# EAGLE board BMSafeMasterV2 (EAGLE 6.3), part 1 of 2
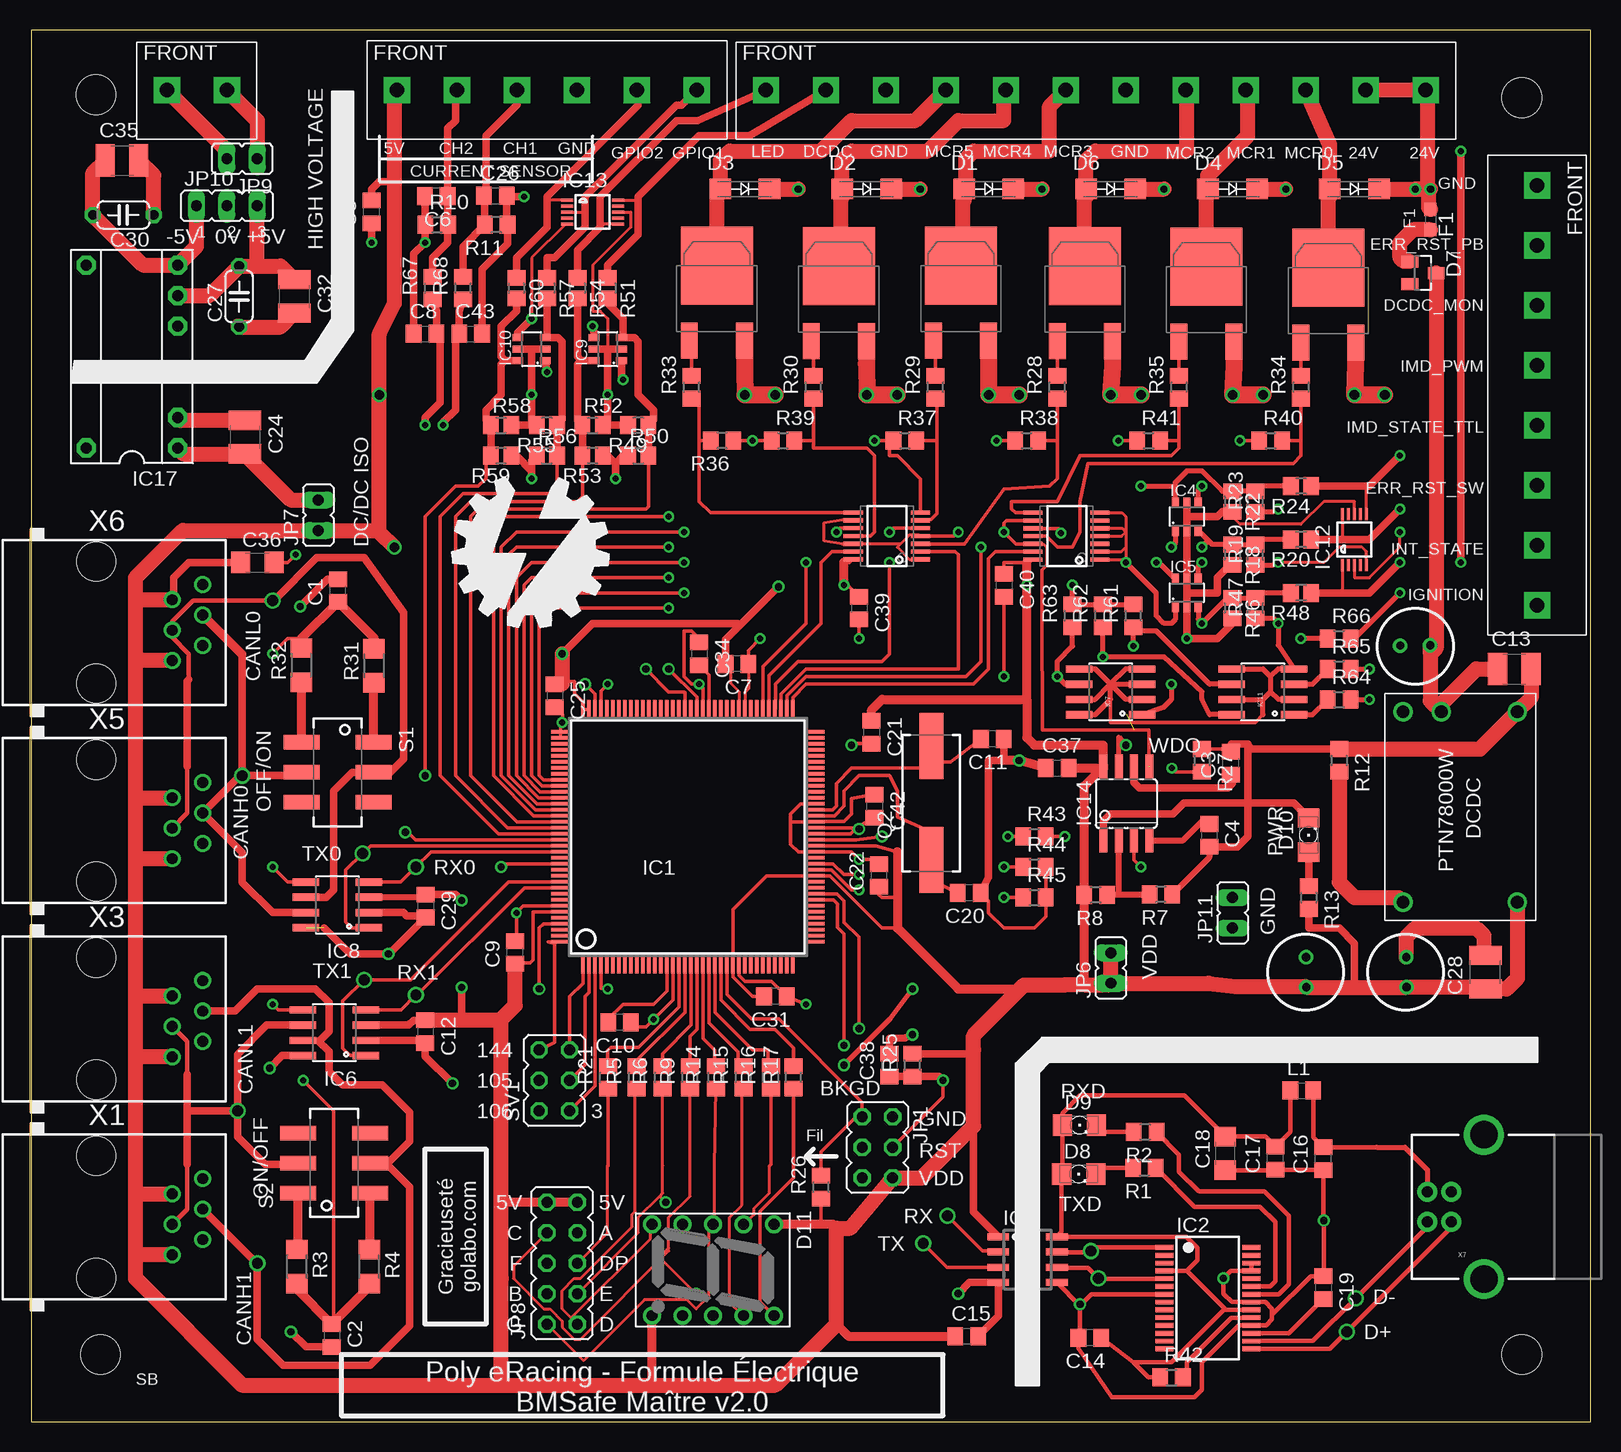
[diagram p0: board, top side]
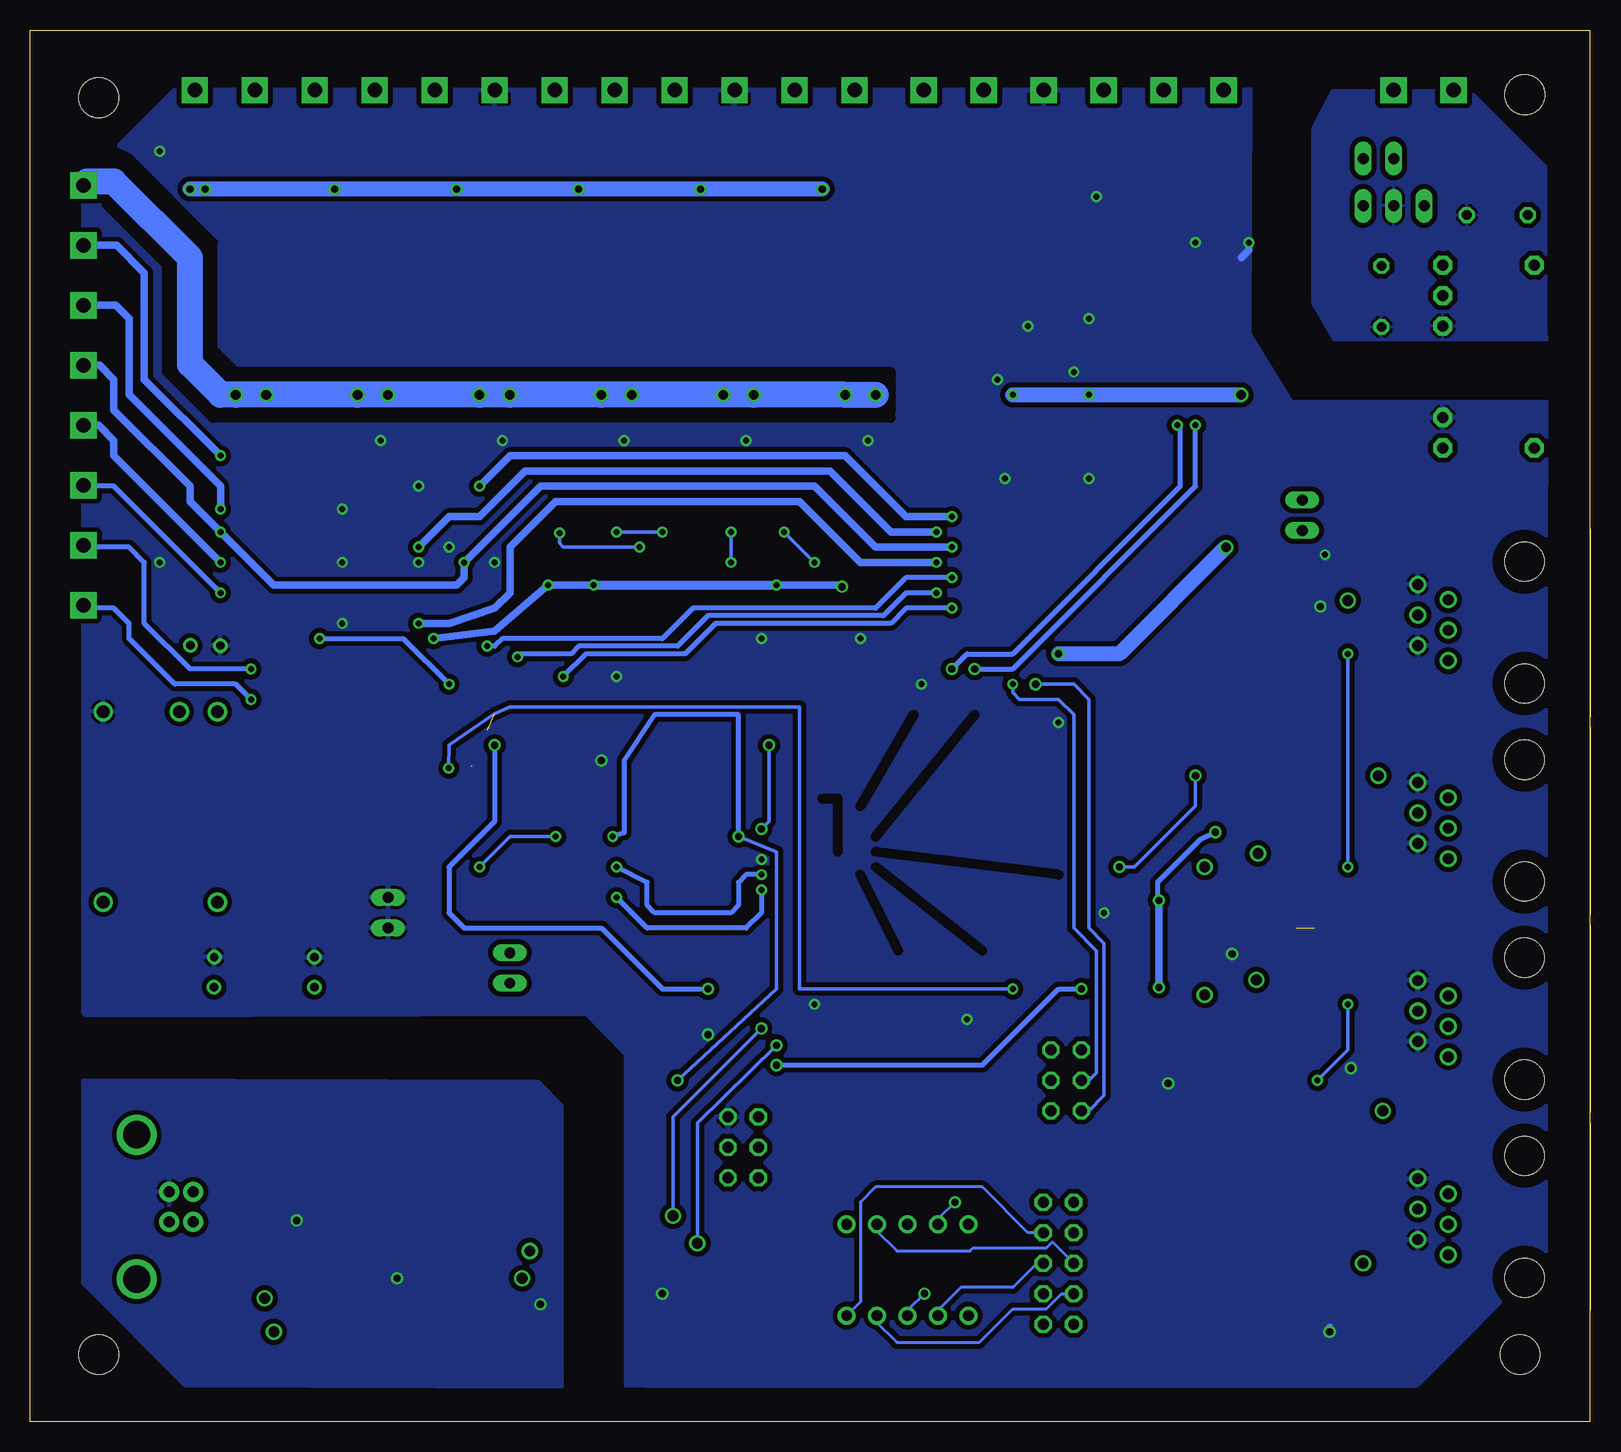
[diagram p1: board, bottom side, seen from below]

Size 130.09 x 116 mm. Coordinates in mm from the lower left corner, seen from the top.
Copper layers (1*16): Top 0.035mm / dielectric 1.5mm / Bottom 0.035mm
Design rules "labo_circuits": minimum track width 5mil, minimum drill 0.200659375mm, track to track 5mil, track to pad 5mil, pad to pad 5mil, via to via 5mil, smd to smd 5mil, copper to edge 40mil, drill to drill 8mil, minimum pad ring 10mil, minimum via ring 8mil, stop-mask expansion 4mil, vias tented up to drill 0mil, thermal gap 10mil
bRestrict: 17 lines

## Footprints (pad centres in the part's own frame; a part is rotated, then mirrored left to right if it is on the bottom)
C0805 = smd 1.3 x 1.5: 1 -0.95,0; 2 0.95,0
C1210 = smd 1.6 x 2.7: 1 -1.4,0; 2 1.4,0
C1206 = smd 1.6 x 1.8: 1 -1.4,0; 2 1.4,0
EEU-FM1E101 = drill 0.7: 1 -1.25,-0.06; 2 1.25,-0.05
C050-024X044 = drill 0.813 octagon: 1 -2.54,0; 2 2.54,0
SMA-DO214AC = smd 1.8 x 1.7: A -2.05,0; K 2.05,0
SOT23 = smd 1 x 1.4: 1 -0.95,-1.1; 2 0.95,-1.1; 3 0,1.1
1206 = smd 1.6 x 1.803: A -1.422,0; C 1.422,0
LA-401 = drill 0.9 pad 1.5: 1 -3.81,5.08; 2 -3.81,2.54; 3 -3.81,0; 4 -3.81,-2.54; 5 -3.81,-5.08; 6 3.81,-5.08; 7 3.81,-2.54; 8 3.81,0; 9 3.81,2.54; 10 3.81,5.08
0603 = smd 1.1 x 1: 1 -0.85,0; 2 0.85,0
SQFP-S-20X20-144 = smd 0.3 x 1.6: 1 -8.75,-10.6; 2 -8.25,-10.6; 3 -7.75,-10.6; 4 -7.25,-10.6; 5 -6.75,-10.6; 6 -6.25,-10.6; 7 -5.75,-10.6; 8 -5.25,-10.6; 9 -4.75,-10.6; 10 -4.25,-10.6; 11 -3.75,-10.6; 12 -3.25,-10.6; 13 -2.75,-10.6; 14 -2.25,-10.6; 15 -1.75,-10.6; 16 -1.25,-10.6; 17 -0.75,-10.6; 18 -0.25,-10.6; 19 0.25,-10.6; 20 0.75,-10.6; 21 1.25,-10.6; 22 1.75,-10.6; 23 2.25,-10.6; 24 2.75,-10.6; 25 3.25,-10.6; 26 3.75,-10.6; 27 4.25,-10.6; 28 4.75,-10.6; 29 5.25,-10.6; 30 5.75,-10.6; 31 6.25,-10.6; 32 6.75,-10.6; 33 7.25,-10.6; 34 7.75,-10.6; 35 8.25,-10.6; 36 8.75,-10.6; 73 8.75,10.6; 74 8.25,10.6; 75 7.75,10.6; 76 7.25,10.6; 77 6.75,10.6; 78 6.25,10.6; 79 5.75,10.6; 80 5.25,10.6; 81 4.75,10.6; 82 4.25,10.6; 83 3.75,10.6; 84 3.25,10.6; 85 2.75,10.6; 86 2.25,10.6; 87 1.75,10.6; 88 1.25,10.6; 89 0.75,10.6; 90 0.25,10.6; 91 -0.25,10.6; 92 -0.75,10.6; 93 -1.25,10.6; 94 -1.75,10.6; 95 -2.25,10.6; 96 -2.75,10.6; 97 -3.25,10.6; 98 -3.75,10.6; 99 -4.25,10.6; 100 -4.75,10.6; 101 -5.25,10.6; 102 -5.75,10.6; 103 -6.25,10.6; 104 -6.75,10.6; 105 -7.25,10.6; 106 -7.75,10.6; 107 -8.25,10.6; 108 -8.75,10.6 | smd 1.6 x 0.3: 37 10.6,-8.75; 38 10.6,-8.25; 39 10.6,-7.75; 40 10.6,-7.25; 41 10.6,-6.75; 42 10.6,-6.25; 43 10.6,-5.75; 44 10.6,-5.25; 45 10.6,-4.75; 46 10.6,-4.25; 47 10.6,-3.75; 48 10.6,-3.25; 49 10.6,-2.75; 50 10.6,-2.25; 51 10.6,-1.75; 52 10.6,-1.25; 53 10.6,-0.75; 54 10.6,-0.25; 55 10.6,0.25; 56 10.6,0.75; 57 10.6,1.25; 58 10.6,1.75; 59 10.6,2.25; 60 10.6,2.75; 61 10.6,3.25; 62 10.6,3.75; 63 10.6,4.25; 64 10.6,4.75; 65 10.6,5.25; 66 10.6,5.75; 67 10.6,6.25; 68 10.6,6.75; 69 10.6,7.25; 70 10.6,7.75; 71 10.6,8.25; 72 10.6,8.75; 109 -10.6,8.75; 110 -10.6,8.25; 111 -10.6,7.75; 112 -10.6,7.25; 113 -10.6,6.75; 114 -10.6,6.25; 115 -10.6,5.75; 116 -10.6,5.25; 117 -10.6,4.75; 118 -10.6,4.25; 119 -10.6,3.75; 120 -10.6,3.25; 121 -10.6,2.75; 122 -10.6,2.25; 123 -10.6,1.75; 124 -10.6,1.25; 125 -10.6,0.75; 126 -10.6,0.25; 127 -10.6,-0.25; 128 -10.6,-0.75; 129 -10.6,-1.25; 130 -10.6,-1.75; 131 -10.6,-2.25; 132 -10.6,-2.75; 133 -10.6,-3.25; 134 -10.6,-3.75; 135 -10.6,-4.25; 136 -10.6,-4.75; 137 -10.6,-5.25; 138 -10.6,-5.75; 139 -10.6,-6.25; 140 -10.6,-6.75; 141 -10.6,-7.25; 142 -10.6,-7.75; 143 -10.6,-8.25; 144 -10.6,-8.75
SSOP28 = smd 0.4 x 1.5: 1 -4.225,-3.625; 2 -3.575,-3.625; 3 -2.925,-3.625; 4 -2.275,-3.625; 5 -1.625,-3.625; 6 -0.975,-3.625; 7 -0.325,-3.625; 8 0.325,-3.625; 9 0.975,-3.625; 10 1.625,-3.625; 11 2.275,-3.625; 12 2.925,-3.625; 13 3.575,-3.625; 14 4.225,-3.625; 15 4.225,3.625; 16 3.575,3.625; 17 2.925,3.625; 18 2.275,3.625; 19 1.625,3.625; 20 0.975,3.625; 21 0.325,3.625; 22 -0.325,3.625; 23 -0.975,3.625; 24 -1.625,3.625; 25 -2.275,3.625; 26 -2.925,3.625; 27 -3.575,3.625; 28 -4.225,3.625
SOIC = smd 0.6 x 1.8: 1 -1.905,-2.44; 2 -0.635,-2.44; 3 0.635,-2.44; 4 1.905,-2.44; 5 1.905,2.44; 6 0.635,2.44; 7 -0.635,2.44; 8 -1.905,2.44
SOT-26 = smd 0.6 x 0.9: 1 -0.95,-1.15; 2 0,-1.15; 3 0.95,-1.15; 4 0.95,1.15; 5 0,1.15; 6 -0.95,1.15
SO8 = smd 0.61 x 2.21: 1 -1.905,-2.616; 2 -0.635,-2.616; 3 0.635,-2.616; 4 1.905,-2.616; 5 1.905,2.616; 6 0.635,2.616; 7 -0.635,2.616; 8 -1.905,2.616
SO08 = smd 0.61 x 2.21: 1 -1.905,-2.616; 2 -0.635,-2.616; 3 0.635,-2.616; 4 1.905,-2.616; 5 1.905,2.616; 6 0.635,2.616; 7 -0.635,2.616; 8 -1.905,2.616
MSOP10 = smd 1 x 0.25: 1 -2.113,1; 2 -2.113,0.5; 3 -2.113,0; 4 -2.113,-0.5; 5 -2.113,-1; 6 2.113,-1; 7 2.113,-0.5; 8 2.113,0; 9 2.113,0.5; 10 2.113,1
SOIC08 = smd 0.66 x 2.032: 1 -1.905,-3.073; 2 -0.635,-3.073; 3 0.635,-3.073; 4 1.905,-3.073; 5 1.905,3.073; 6 0.635,3.073; 7 -0.635,3.073; 8 -1.905,3.073
TSSOP14 = smd 0.35 x 1.6: 1 -1.95,-2.8; 2 -1.3,-2.8; 3 -0.65,-2.8; 4 0,-2.8; 5 0.65,-2.8; 6 1.3,-2.8; 7 1.95,-2.8; 8 1.95,2.8; 9 1.3,2.8; 10 0.65,2.8; 11 0,2.8; 12 -0.65,2.8; 13 -1.3,2.8; 14 -1.95,2.8
DIL14/7 = drill 0.914 pad 1.6 octagon: 1 -7.62,-3.81; 2 -5.08,-3.81; 5 2.54,-3.81; 6 5.08,-3.81; 7 7.62,-3.81; 8 7.62,3.81; 14 -7.62,3.81
DCDCMAITRE_HOLES = drill 1.067: 1 -7.874,4.699; 2 -7.874,-1.651; 3 -7.874,-4.826; 4 8.001,-4.826; 5 8.001,4.699
JP3Q = drill 0.914 octagon: 1 -2.54,-1.27; 2 -2.54,1.27; 3 0,-1.27; 4 0,1.27; 5 2.54,-1.27; 6 2.54,1.27
STAND-OFF = hole 3.302: 0,0
JP1 = drill 0.914 long: 1 0,-1.27; 2 0,1.27
JP5Q = drill 0.914 octagon: 1 -5.08,-1.27; 2 -5.08,1.27; 3 -2.54,-1.27; 4 -2.54,1.27; 5 0,-1.27; 6 0,1.27; 7 2.54,-1.27; 8 2.54,1.27; 9 5.08,-1.27; 10 5.08,1.27
JP2 = drill 0.914 long: 1 -2.54,0; 2 0,0; 3 2.54,0
TO-252 = smd 1.4 x 3: P$1 -2.3,-6.25; P$3 2.3,-6.25 | smd 6 x 6.5: P$4 0,0
CSM-7X = smd 5.5 x 2: 1 -4.75,0; 2 4.75,0
R0805 = smd 1.3 x 1.5: 1 -0.95,0; 2 0.95,0
R1206 = smd 1.6 x 1.803: 1 -1.422,0; 2 1.422,0
R0805' = smd 1.3 x 1.5: 1 -0.85,0; 2 0.85,0
DPDT = smd 1.2 x 3: 1 -2.5,3; 2 0,3; 3 2.5,3; 4 -2.5,-3; 5 0,-3; 6 2.5,-3
RJ11-NO_SHIELD = drill 0.9 pad 1.4: 1 -3.175,8.89; 2 -1.905,6.35; 3 -0.635,8.89; 4 0.635,6.35; 5 1.905,8.89; 6 3.175,6.35 | hole 3.251: -5.08,0; 5.08,0
282836-6 = drill 1.2 pad 2.184 square: CON01 -12.5,0; CON02 -7.5,0; CON03 -2.5,0; CON04 2.5,0; CON05 7.5,0; CON06 12.5,0
1-282836-2 = drill 1.2 pad 2.184 square: CON1 -30,0; CON2 -25,0; CON3 -20,0; CON4 -15,0; CON5 -10,0; CON6 -5,0; CON7 0,0; CON8 5,0; CON9 10,0; CON10 15,0; CON11 20,0; CON12 25,0
USB-B-PTH = drill 0.914 pad 1.676: D+ 0,1.25; D- 1.981,1.25; GND 0,-1.25; VBUS 1.981,-1.25 | drill 2.286: S1 -2.718,-6.02; S2 -2.718,6.02
282836-2 = drill 1.2 pad 2.184 square: CON1 -2.46,0; CON2 2.54,0
282836-8 = drill 1.2 pad 2.184 square: CON01 -20,0; CON02 -15,0; CON03 -10,0; CON04 -5,0; CON05 0,0; CON06 5,0; CON07 10,0; CON08 15,0

## Placement (x,y rotation side)
C1  47n  [C0805]  25.67,69.27 90 top
C2  47n  [C0805]  25.16,7.17 270 top
C3  100n  [C0805]  100.11,54.87 90 top
C4  100n  [C0805]  98.3,48.87 270 top
C5  47n  [C0805]  28.48,100.83 90 top
C6  47n  [C0805]  33.86,102.15 180 top
C7  100n  [C0805]  58.93,63.16 180 top
C8  LPF  [C0805]  32.93,90.67 0 top
C9  100n  [C0805]  40.44,39.1 90 top
C10  220nF  [C0805]  49.15,33.27 180 top
C11  18p  [C0805]  80.22,56.9 180 top
C12  100n  [C0805]  32.95,32.51 270 top
C13  2.2u  [C1210]  123.73,62.73 0 top
C14  0.047u  [C0805]  88.35,6.97 180 top
C15  0.047u  [C0805]  78.08,7.12 0 top
C16  10n  [C0805]  107.8,21.91 90 top
C17  100n  [C0805]  103.81,21.96 90 top
C18  4.7u  [C1206]  99.64,22.35 90 top
C19  100n  [C0805]  107.82,11.18 270 top
C20  18p  [C0805]  78.3,44.07 180 top
C21  100n  [C0805]  70.16,57.46 270 top
C22  100n  [C0805]  70.79,45.52 90 top
C23  100u  [EEU-FM1E101]  106.33,37.46 90 top
C24  2.2u  [C1210]  17.92,82.06 270 top
C25  100n  [C0805]  43.75,60.5 270 top
C26  47n  [C0805]  38.8,102.18 0 top
C27  1u  [C050-024X044]  17.43,93.79 90 top
C28  2.2u  [C1210]  121.32,37.46 90 top
C29  100n  [C0805]  32.98,42.97 270 top
C30  1u  [C050-024X044]  7.78,100.58 180 top
C31  100n  [C0805]  62.14,35.43 180 top
C32  2.2u  [C1210]  22.03,93.78 270 top
C33  100u  [EEU-FM1E101]  114.68,37.47 90 top
C34  220nF  [C0805]  55.79,64 270 top
C35  2.2u  [C1210]  7.67,105.12 0 top
C36  4.7u  [C1206]  18.96,71.62 0 top
C37  100n  [C0805]  85.63,54.47 0 top
C38  100p  [C0805]  71.66,29.71 90 top
C39  100n  [C0805]  69.12,67.81 270 top
C40  100n  [C0805]  81.19,69.71 270 top
C41  470u  [EEU-FM1E101]  115.48,64.63 180 top
C42  220n  [C0805]  70.39,51.3 270 top
C43  LPF  [C0805]  36.74,90.67 0 top
D1  GF1  [SMA-DO214AC]  79.92,102.74 0 top
D2  GF1  [SMA-DO214AC]  69.76,102.74 0 top
D3  GF1  [SMA-DO214AC]  59.6,102.74 0 top
D4  GF1  [SMA-DO214AC]  100.24,102.74 0 top
D5  GF1  [SMA-DO214AC]  110.4,102.74 0 top
D6  GF1  [SMA-DO214AC]  90.08,102.74 0 top
D7  BAT54  [SOT23]  116.11,95.75 270 top
D8  [1206]  87.42,20.64 0 top
D9  [1206]  87.48,24.72 0 top
D10  [1206]  106.59,48.89 90 top
D11  LA-401AD  [LA-401]  56.93,12.64 270 top
F1  467  [0603]  116.75,100.19 270 top
IC1  MC9S12XF-144  [SQFP-S-20X20-144]  54.84,48.74 0 top
IC2  FT232RL  [SSOP28]  98.18,10.29 270 top
IC3  ADUM1201  [SOIC]  83.16,13.5 270 top
IC4  SDM10M45SD  [SOT-26]  96.43,75.43 0 top
IC5  SDM10M45SD  [SOT-26]  96.43,69.08 0 top
IC6  TJA1040  [SO8]  25.37,32.41 90 top
IC7  ILD213T  [SO08]  90.08,60.82 90 top
IC8  TJA1040  [SO8]  25.63,43.06 90 top
IC9  SDM10M45SD  [SOT-26]  48.17,89.4 90 top
IC10  SDM10M45SD  [SOT-26]  41.82,89.4 90 top
IC11  ILD213T  [SO08]  102.78,60.82 90 top
IC12  CM1213-08MR  [MSOP10]  110.4,73.52 90 top
IC13  CM1213-08MR  [MSOP10]  46.9,100.83 0 top
IC14  WATCHDOG  [SOIC08]  91.39,51.52 0 top
IC15  SN74HC08  [TSSOP14]  71.43,73.82 90 top
IC16  SN74HC08  [TSSOP14]  86.4,73.81 90 top
IC17  DCP0115P  [DIL14/7]  8.49,88.78 90 top
IC18  DCDCMAITRE_HOLES  [DCDCMAITRE_HOLES]  119.29,51.3 270 top
JP1  [JP3Q]  70.64,22.85 270 top
JP2  STAND-OFF  [STAND-OFF]  5.87,5.58 0 top
JP3  STAND-OFF  [STAND-OFF]  124.37,5.58 0 top
JP4  STAND-OFF  [STAND-OFF]  5.49,110.61 0 top
JP5  STAND-OFF  [STAND-OFF]  124.37,110.36 0 top
JP6  [JP1]  90.09,37.81 0 top
JP7  [JP1]  24.04,75.56 0 top
JP8  [JP5Q]  44.36,13.2 90 top
JP9  [JP1]  17.69,105.27 90 top
JP10  [JP2]  16.42,101.34 0 top
JP11  [JP1]  100.24,42.41 0 top
L1  MYDEVICE  [C0805]  106.01,27.59 0 top
Q1  IRLR014  [TO-252]  57.27,96.35 0 top
Q2  [CSM-7X]  75.14,51.55 90 top
Q3  IRLR014  [TO-252]  67.43,96.32 0 top
Q4  IRLR014  [TO-252]  77.6,96.35 0 top
Q5  IRLR014  [TO-252]  87.94,96.32 0 top
Q6  IRLR014  [TO-252]  108.23,96.19 0 top
Q7  IRLR014  [TO-252]  98.07,96.26 0 top
R1  475  [R0805]  92.9,21.13 180 top
R2  475  [R0805]  92.95,24.13 180 top
R3  60.4  [R1206]  22.25,12.93 270 top
R4  60.4  [R1206]  28.29,12.91 270 top
R5  10K  [R0805]  50.58,28.69 90 top
R6  10K  [R0805]  52.74,28.69 90 top
R7  1M  [R0805]  94.27,43.93 180 top
R8  1M  [R0805]  88.84,43.9 180 top
R9  10K  [R0805]  55.03,28.69 90 top
R10  100k  [R0805]  33.91,99.77 0 top
R11  100k  [R0805]  38.86,99.77 180 top
R12  21k  [R0805]  109.13,55.11 270 top
R13  475  [R0805]  106.59,43.68 270 top
R14  10K  [R0805]  57.18,28.69 90 top
R15  10K  [R0805]  59.47,28.69 90 top
R16  10K  [R0805]  61.76,28.69 90 top
R17  10K  [R0805]  63.65,28.69 90 top
R18  10k  [R0805']  100.24,72.25 270 top
R19  10k  [R0805']  102.14,72.25 90 top
R20  2.5k  [R0805']  105.95,73.52 180 top
R21  10k  [R0805]  48.17,28.69 90 top
R22  10k  [R0805']  100.24,76.7 270 top
R23  10k  [R0805']  102.14,76.7 90 top
R24  2.5k  [R0805']  105.95,77.97 180 top
R25  10k  [R0805]  73.57,29.71 90 top
R26  10k  [R0805]  65.95,19.55 90 top
R27  10k  [R0805]  97.7,55.11 270 top
R28  1k  [R0805]  85.63,86.23 90 top
R29  1k  [R0805]  75.47,86.23 90 top
R30  1k  [R0805]  65.31,86.23 90 top
R31  60.4  [R1206]  28.67,63 90 top
R32  60.4  [R1206]  22.62,63.05 90 top
R33  1k  [R0805]  55.15,86.23 90 top
R34  1k  [R0805]  105.95,86.23 90 top
R35  1k  [R0805]  95.79,86.23 90 top
R36  10k  [R0805]  57.69,81.78 180 top
R37  10k  [R0805]  72.93,81.78 0 top
R38  10k  [R0805]  83.09,81.78 0 top
R39  10k  [R0805]  62.77,81.78 0 top
R40  10k  [R0805]  103.41,81.78 0 top
R41  10k  [R0805]  93.25,81.78 0 top
R42  10k  [R0805]  95.16,3.68 0 top
R43  0  [R0805]  83.73,48.76 0 top
R44  4.7k  [R0805]  83.73,46.22 0 top
R45  4.7k  [R0805]  83.73,43.68 0 top
R46  10k  [R0805']  100.24,67.81 270 top
R47  10k  [R0805']  102.14,67.81 90 top
R48  2.5k  [R0805']  105.95,69.08 180 top
R49  10k  [R0805']  50.71,83.05 180 top
R50  10k  [R0805']  50.71,80.51 0 top
R51  2.5k  [R0805']  48.17,94.48 270 top
R52  10k  [R0805']  46.9,83.05 0 top
R53  10k  [R0805']  46.9,80.51 180 top
R54  2.5k  [R0805']  45.63,94.48 270 top
R55  10k  [R0805']  43.09,83.05 180 top
R56  10k  [R0805']  43.09,80.51 0 top
R57  2.5k  [R0805']  43.09,94.48 270 top
R58  10k  [R0805']  39.28,83.05 0 top
R59  10k  [R0805']  39.28,80.51 180 top
R60  2.5k  [R0805']  40.55,94.48 270 top
R61  TBD  [R0805]  91.98,67.18 90 top
R62  TBD  [R0805]  89.44,67.18 90 top
R63  TBD  [R0805]  86.9,67.18 90 top
R64  TBD  [R0805]  109.13,60.19 0 top
R65  TBD  [R0805]  109.13,62.73 0 top
R66  TBD  [R0805]  109.13,65.27 0 top
R67  LPF  [R0805]  33.56,94.48 90 top
R68  LPF  [R0805]  36.1,94.48 90 top
S1  SWITCH_DPDT  [DPDT]  25.63,54.11 270 top
S2  SWITCH_DPDT  [DPDT]  25.37,21.55 90 top
SV1  [JP3Q]  43.72,28.44 90 top
X1  RJ11-2L-B  [RJ11-NO_SHIELD]  5.51,17.07 270 top
X2  282836-6  [282836-6]  43.09,110.99 0 top
X3  RJ11-2L-B  [RJ11-NO_SHIELD]  5.51,33.58 270 top
X4  1-282836-2  [1-282836-2]  91.35,110.99 0 top
X5  RJ11-2L-B  [RJ11-NO_SHIELD]  5.51,50.09 270 top
X6  RJ11-2L-B  [RJ11-NO_SHIELD]  5.51,66.6 270 top
X7  USBPTH  [USB-B-PTH]  118.47,17.88 180 top
X8  282836-2  [282836-2]  13.88,110.99 0 top
X9  282836-8  [282836-8]  125.64,83.05 270 top

## Library data of the parts
C1 C2 C5 C6 C14 C15 C26 = rcl; PARTNO: 08055C473KAT2A
C3 C4 C7 C9 C12 C17 C19 C21 C22 C25 C29 C31 C37 C39 C40 = rcl; PARTNO: 08055C104KAT2A
C8 C43 R61-R68 = rcl
C10 C34 C42 = rcl; PARTNO: C2012X7R1H224K125AA
C11 C20 = rcl; PARTNO: 08055A180JAT2A
C13 C28 = rcl; PARTNO: C3225X7R1H225K250AB
C16 = rcl; PARTNO: 08055C103KAT2A
C18 C36 = rcl; PARTNO: C3216X5R1A475K
C23 C33 = elc_n; PARTNO: EEU-FM1E101
C24 C32 C35 = rcl; DNP: T; PARTNO: C3225X7R1H225K250AB
C27 C30 = rcl; DNP: T; PARTNO: TAP105M035SCS
C38 = rcl; PARTNO: C0805C101J5GACTU
C41 = elc_n
D1-D6 = diode
D7 = diode; PARTNO: BAT750TA
D8 D9 = led; PARTNO: LTST-C150KSKT
D10 = led; PARTNO: LTST-C150KGKT
D11 = led-7-segment; PARTNO: LA-401AD
F1 = BMSafeMasterIO; PARTNO: 0467.250NR
IC1 = freescale; MPN: LFDAS12XFLT; OC_FARNELL: unknown; OC_NEWARK: 14M5920; PARTNO: MC9S12XDP512MAG
IC2 = ftdichip; PARTNO: FT232RL
IC3 = adum1201; PARTNO: ADUM1201WTRZ
IC4 IC5 IC9 IC10 = BMSafeMasterIO; PARTNO: SDM10M45SD-7-F
IC6 IC8 = ELE4000_BMS; PARTNO: TJA1040
IC7 IC11 = SparkFun; PARTNO: ILD213T
IC12 IC13 = BMSafeMasterIO; PARTNO: CM1213-08MR
IC14 = Watchdog; PARTNO: UCC2946D
IC15 IC16 = sn74hc08; PARTNO: SN74HC08QPWRQ1
IC17 = DCP0105; DNP: T; PARTNO: DCP010505BP-U
IC18 = PTN78000W; PARTNO: PTN78000WAH
JP1 = jumper; PARTNO: 67996-206HLF
JP2-JP5 = SparkFun; BOM: EXCLUDE
JP6 JP7 JP9 JP11 = jumper; DNP: T; PARTNO: 68001-202HLF
JP8 = jumper; DNP: T; PARTNO: 68602-110HLF
JP10 = jumper; DNP: T; PARTNO: 68000-103HLF
L1 = rcl; PARTNO: MI0805K400R-10
Q1 Q3-Q7 = transistor-power; PARTNO: IRLR014TRPBF
Q2 = ELE4000_BMS; PARTNO: ECS-160-18-5PXEN-TR
R1 R2 R13 = rcl; PARTNO: MCR10EZHF4750
R3 R4 R31 R32 = rcl; PARTNO: MCR18EZPF60R4
R5 R6 R9 R14-R17 R21 R25-R27 R36-R42 = rcl; PARTNO: RC0805JR-0710KL
R7 R8 = rcl; PARTNO: MCR10EZPJ105
R10 R11 = rcl; PARTNO: MCR10EZHJ104
R12 = rcl; PARTNO: RR1220P-2102-D-M
R18 R22 R46 R49 R52 R55 R58 = resistor; PARTNO: RC0805JR-0710KL
R19 R23 R47 R50 R53 R56 R59 = resistor; DNP: T; PARTNO: RC0805JR-0710KL
R20 R24 R48 R51 R54 R57 R60 = resistor; PARTNO: RC0805FR-072K43L
R28-R30 R33-R35 = rcl; PARTNO: RC0805JR-071KL
R43 = rcl; DNP: T; PARTNO: RMCF0805ZT0R00
R44 R45 = rcl; PARTNO: RMCF0805JT4K70
S1 S2 = ELE4000_BMS; PARTNO: JS202011SCQN
SV1 = jumper; DNP: T; PARTNO: 67996-206HLF
X1 X3 X5 X6 = con-tycoelectronics; PARTNO: 5555165-1
X2 = con_tyco_eurostyle; PARTNO: 282836-6
X4 = con_tyco_eurostyle; PARTNO: 1-282836-2
X7 = SparkFun; PARTNO: 292304-1
X8 = con_tyco_eurostyle; DNP: T; PARTNO: 282836-2
X9 = con_tyco_eurostyle; PARTNO: 282836-8

## Nets
5V_MST: C5.2 C7.2 C9.1 C12.1 C15.1 C21.1 C22.1 C23.1 C25.1 C28.1 C29.1 C31.2 C33.1 C36.1 C37.2 C39.1 C40.1 D11.1 D11.6 IC1.26 IC1.48 IC1.53 IC1.82 IC1.107 IC1.108 IC1.127 IC1.139 IC3.1 IC4.2 IC4.5 IC5.2 IC5.5 IC6.3 IC8.3 IC9.2 IC9.5 IC10.2 IC10.5 IC12.8 IC13.8 IC14.8 IC15.14 IC16.14 IC18.5 JP1.6 JP6.1 JP6.2 JP7.1 JP8.9 JP8.10 R8.2 R13.2 R18.2 R22.2 R25.2 R26.1 R46.2 R49.2 R52.2 R55.2 R58.2 R61.2 R62.2 R63.2 X1.2 X1.6 X2.CON01 X3.2 X3.6 X5.2 X5.6 X6.2 X6.6
5V_USB: C14.1 C17.2 C18.2 D8.A D9.A IC2.4 IC2.20 IC3.8 L1.1 R42.1
+5V_ISO: C27.2 C32.1 IC17.6 JP10.3
-5V_ISO: C30.2 C35.1 IC17.7 JP10.1
AN00: C43.1 IC1.89 R68.1
AN00_C: C26.1 R11.2 R68.2 X2.CON03
AN01: C8.2 IC1.91 R67.1
AN01_C: C6.1 R10.2 R67.2 X2.CON02
AN16: IC1.105 SV1.4
AN17: IC1.106 SV1.2
B: D11.9 JP8.4 R15.1
BKGD: IC1.25 JP1.1 R26.2
C: D11.8 JP8.8 R9.1
CANH0: IC8.7 S1.5 X5.3 X6.3
CANH1: IC6.7 S2.5 X1.3 X3.3
CANL0: IC8.6 S1.2 X5.4 X6.4
CANL1: IC6.6 S2.2 X1.4 X3.4
D: D11.5 JP8.1 R5.1
DCDC_MONITOR: IC1.122 IC4.3 R18.1 R19.2 R20.2
DCDC_MONITOR_C: IC12.10 R20.1 X9.CON03
DCDC_MOSFET: IC1.124 IC9.3 R49.1 R50.2 R51.2
DCDC_MOSFET_C: IC13.10 R51.1 X4.CON2
DP: D11.7 JP8.5 R21.1
E: D11.4 JP8.3 R6.1
ERR_RST_DASH: IC1.117 IC7.6 R63.1
ERR_RST_DASH_C: R66.2 X9.CON06
ERR_RST_PUSHBUTTON: IC1.123 IC4.6 R22.1 R23.2 R24.2
ERR_RST_PUSHBUTTON_C: IC12.6 R24.1 X9.CON02
EXTAL: C20.2 IC1.58 Q2.1
F: D11.2 JP8.6 R16.1
G: D11.3 JP8.2 R14.1
GM2: IC15.3 R28.1 R38.2
GM3: IC15.6 R29.1 R37.2
GND_MOSFET: Q1.P$3 Q3.P$3 Q4.P$3 Q5.P$3 Q6.P$3 Q7.P$3 X9.CON01
GND_MST: C1.2 C2.2 C3.2 C4.2 C5.1 C6.2 C7.1 C8.1 C9.2 C10.1 C11.1 C12.2 C13.2 C15.2 C20.1 C22.2 C23.2 C24.1 C25.2 C26.2 C28.2 C29.2 C31.1 C33.2 C34.1 C36.2 C37.1 C38.2 C39.2 C40.2 C41.2 C42.1 C43.2 D10.C IC1.16 IC1.27 IC1.52 IC1.57 IC1.60 IC1.81 IC1.88 IC1.109 IC1.110 IC1.138 IC3.4 IC4.1 IC4.4 IC5.1 IC5.4 IC6.2 IC6.8 IC7.2 IC7.3 IC7.4 IC7.5 IC7.7 IC7.8 IC8.2 IC8.8 IC9.1 IC9.4 IC10.1 IC10.4 IC11.2 IC11.4 IC11.5 IC11.7 IC12.5 IC13.5 IC14.1 IC15.7 IC16.1 IC16.2 IC16.4 IC16.5 IC16.7 IC17.2 IC18.1 JP1.2 JP11.1 JP11.2 R7.1 R10.1 R11.1 R12.1 R19.1 R23.1 R27.1 R36.1 R37.1 R38.1 R39.1 R40.1 R41.1 R44.2 R45.2 R47.1 R50.1 R53.1 R56.1 R59.1 X1.1 X1.5 X2.CON04 X3.1 X3.5 X4.CON3 X4.CON7 X5.1 X5.5 X6.1 X6.5
GND_USB: C14.2 C16.1 C17.1 C18.1 C19.1 IC2.7 IC2.18 IC2.21 IC2.25 IC2.26 IC3.5 X7.GND
GPIO1: IC1.126 IC10.3 R55.1 R56.2 R57.2
GPIO1_C: IC13.3 R57.1 X2.CON06
GPIO2: IC1.131 IC10.6 R58.1 R59.2 R60.2
GPIO2_C: IC13.1 R60.1 X2.CON05
HV_GND: C27.1 C30.1 C32.2 C35.2 IC17.5 JP10.2
IGNITION: IC1.119 IC11.6 R61.1
IGNITION_C: R64.2 X9.CON08
IMD_STATE_PWM: IC1.121 IC5.6 IC12.3 X9.CON04
IMD_STATE_TTL: IC1.120 IC5.3 R46.1 R47.2 R48.2
IMD_STATE_TTL_C: IC12.1 R48.1 X9.CON05
INTERLOCK_STATE: IC1.118 IC11.8 R62.1
INTERLOCK_STATE_C: R65.2 X9.CON07
LED_BMS_DASH: IC1.125 IC9.6 R52.1 R53.2 R54.2
LED_BMS_DASH_C: IC13.6 R54.1 X4.CON1
MCR0: D5.A Q6.P$4 X4.CON10
MCR1: D4.A Q7.P$4 X4.CON9
MCR2: D6.A Q5.P$4 X4.CON8
MCR3: D1.A Q4.P$4 X4.CON6
MCR4: D2.A Q3.P$4 X4.CON5
MCR5: D3.A Q1.P$4 X4.CON4
N$2: IC14.2 R7.2 R8.1
N$3: D11.10 JP8.7 R17.1
N$5: C4.1 IC14.4
N$6: IC11.1 R64.1
N$7: C3.1 IC14.6
N$8: D10.A R13.1
N$9: IC11.3 R65.1
N$10: IC16.11 R34.1 R40.2
N$11: Q6.P$1 R34.2
N$12: JP9.2 X8.CON1
N$13: JP9.1 X8.CON2
N$14: IC16.8 R35.1 R41.2
N$15: Q7.P$1 R35.2
N$17: Q1.P$1 R33.2
N$18: C2.1 IC6.5 R3.2 R4.2
N$19: R3.1 S2.1
N$20: R4.1 S2.4
N$21: IC2.15 X7.D+
N$22: IC2.16 X7.D-
N$23: IC2.23 R1.1
N$24: D8.C R1.2
N$25: IC2.22 R2.1
N$26: D9.C R2.2
N$27: C19.2 IC2.17
N$28: IC15.8 R33.1 R36.2
N$29: C1.1 IC8.5 R31.2 R32.2
N$30: IC15.11 R30.1 R39.2
N$32: Q3.P$1 R30.2
N$34: R31.1 S1.1
N$37: R32.1 S1.4
N$42: Q4.P$1 R29.2
N$43: Q5.P$1 R28.2
N$44: IC2.19 R42.2
N$45: IC1.50 R44.1
N$46: IC1.49 R45.1
N$47: D7.1 F1.2
N$49: IC7.1 R66.1
PA0: IC1.73 IC16.13
PA1: IC1.74 IC16.10
PA2: IC1.75 IC15.2
PA3: IC1.76 IC15.5
PA4: IC1.77 IC15.13
PA5: IC1.78 IC15.10
PA6: IC1.79
PA7: IC1.80
PJ0: IC1.24 R17.2
PJ1: IC1.23 R16.2
PK4: IC1.22 R15.2
PK5: IC1.21 R14.2
PP1: IC1.3 SV1.1
PP2: IC1.2 SV1.3
PP3: IC1.1 SV1.5
PP4: IC1.144 SV1.6
PP7: IC1.141 IC14.7
PT4: IC1.17 R21.2
PT5: IC1.18 R5.2
PT6: IC1.19 R6.2
PT7: IC1.20 R9.2
RES_N: IC14.3 R43.2
RST: C38.1 IC1.54 JP1.4 R25.1 R43.1
RXCAN0: IC1.129 IC8.4
RXCAN1: IC1.135 IC6.4
RXD_MST: IC1.45 IC3.2
RXD_USB: IC2.5 IC3.6
TXCAN0: IC1.128 IC8.1
TXCAN1: IC1.134 IC6.1
TXD_MST: IC1.44 IC3.3
TXD_USB: IC2.1 IC3.7
VDD: C34.2 IC1.87
VDD1: C10.2 IC1.15
VDDPLL: C21.2 C42.2 IC1.55 IC1.56
VIN: D1.K D2.K D3.K D4.K D5.K D6.K F1.1 X4.CON11 X4.CON12
VIN_F: C13.1 C41.1 D7.3 IC18.2
VOADJUST: IC18.4 R12.2
VS: C24.2 IC17.1 JP7.2
VUSB: C16.2 L1.2 X7.VBUS
WDO: IC1.4 IC14.5 IC15.1 IC15.4 IC15.9 IC15.12 IC16.9 IC16.12 R27.2
XTAL: C11.2 IC1.59 Q2.2